# Altium PCB PCB1.PcbDoc
Units mil, origin at the board's own origin, x right, y up, seen from the top; angles counter-clockwise.
Board outline 1650 x 1035 mil, 2 copper layers (Top Layer, Bottom Layer); 21 components, 45 nets, 147 pads, 34 vias.
Unrouted connection lines stored in the file: 32.
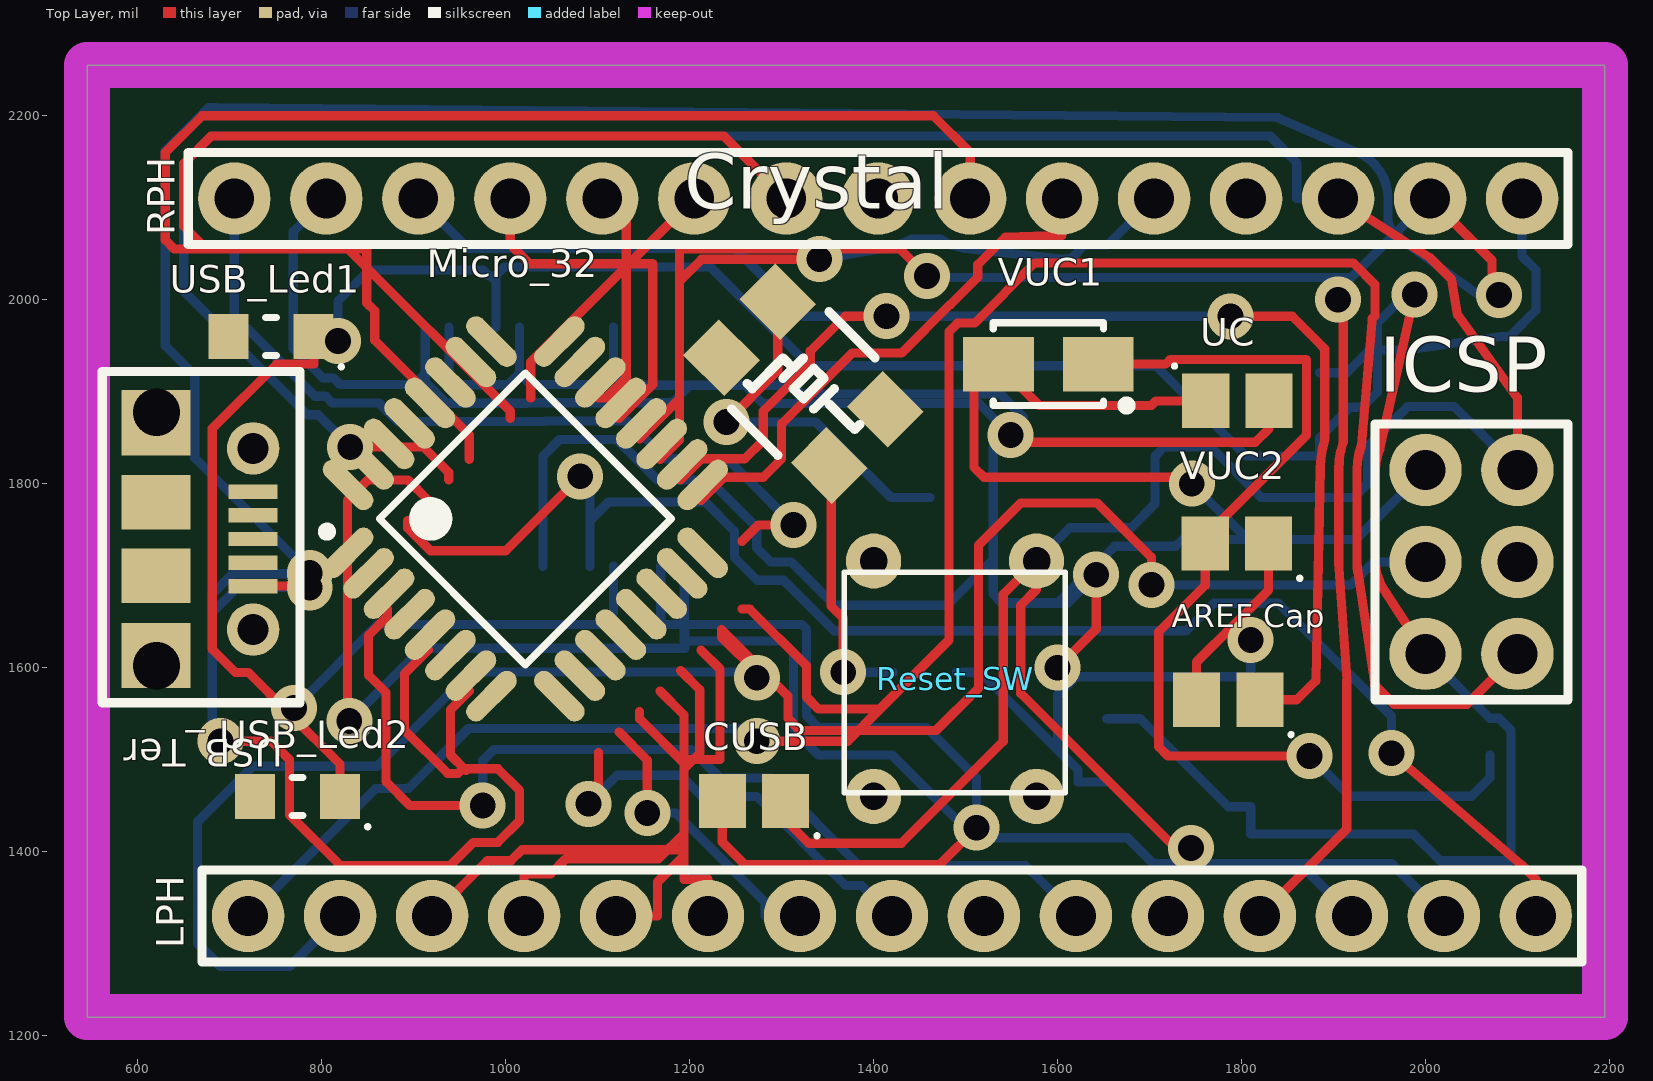
[diagram p0: Top Layer view]
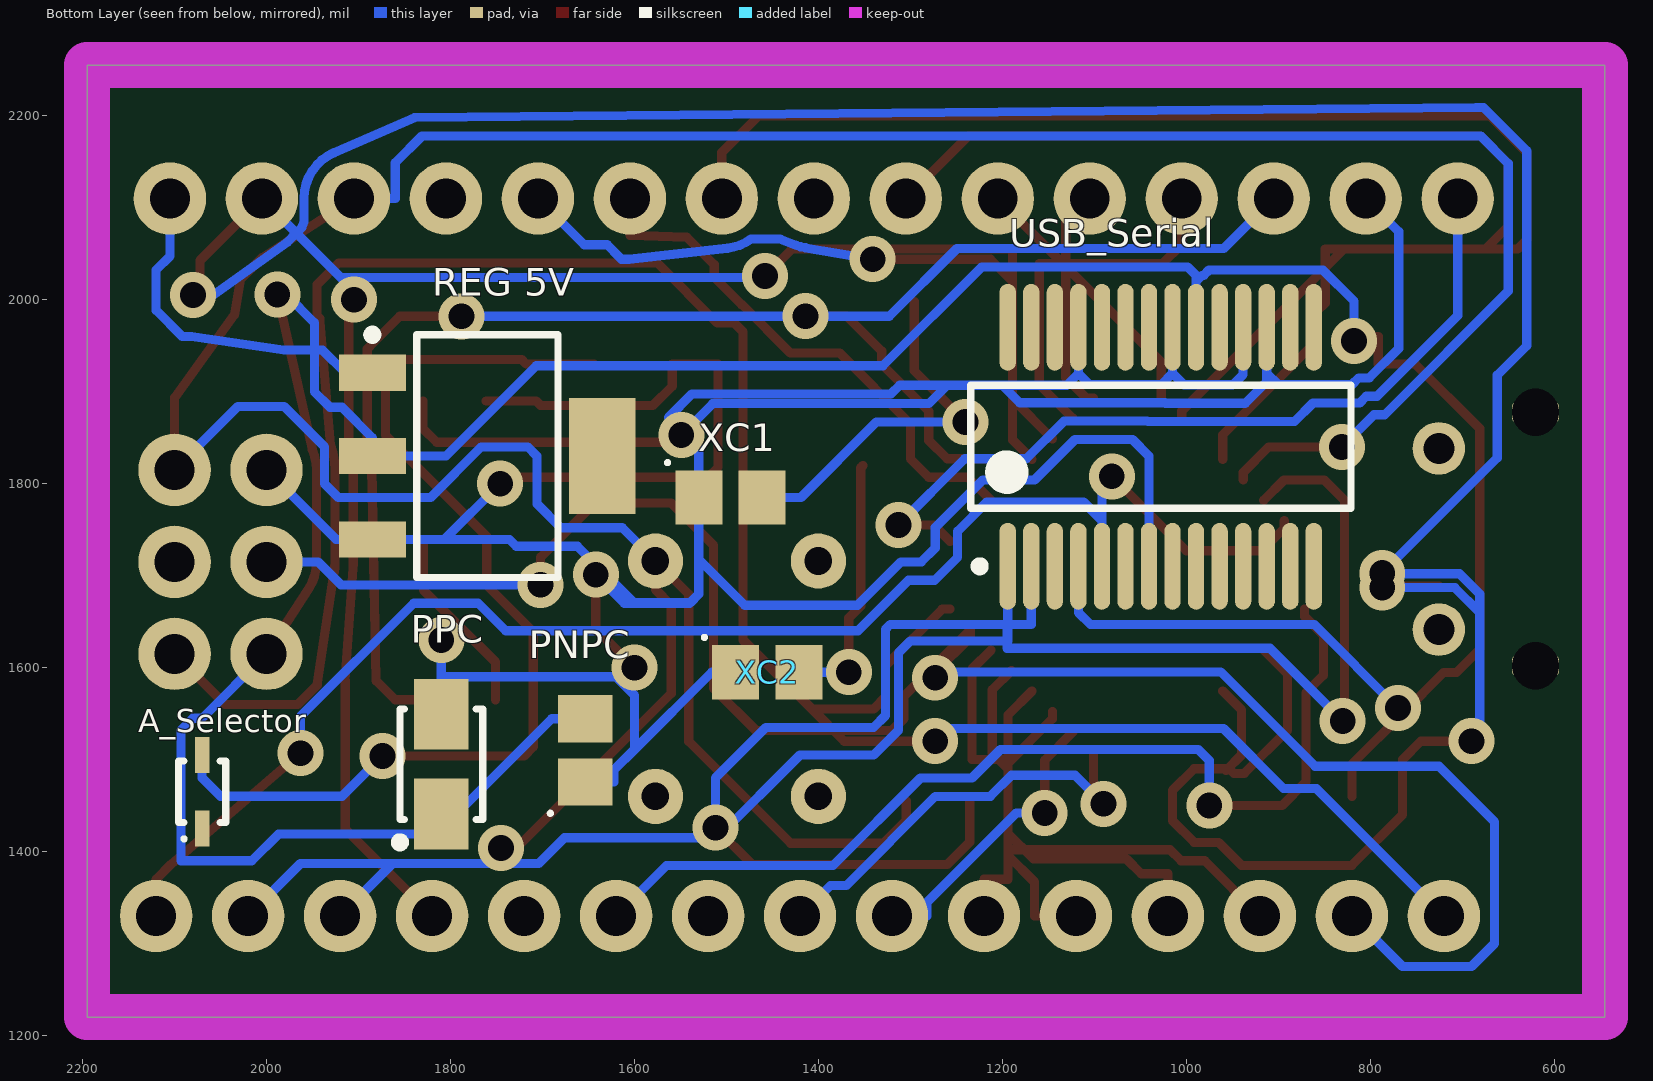
[diagram p1: Bottom Layer view, seen from below]

## Layer stack, top to bottom
Top Solder: solder mask 0.4, Solder Resist, Dk 3.5
Top Layer: signal copper 1.4
Dielectric 1: dielectric 12.6, FR-4, Dk 4.8
Bottom Layer: signal copper 1.4
Bottom Solder: solder mask 0.4, Solder Resist, Dk 3.5

## Board outline
545,1220 545,2255 2195,2255 2195,1220

## Design rules (kind name [scope] priority, off if disabled: settings)
Clearance [All] p1: gap=10 ignorepadtopadclearanceinfootprint=FALSE
PolygonConnect [All] p1: connectstyle=Relief reliefconductorwidth=10 reliefentries=4 polygonreliefangle="90 Angle" airgapwidth=10
RoutingVias [All] p1: holewidth=28 width=50 viastyle="Through Hole" minholewidth=28 minwidth=50 maxholewidth=28 maxwidth=50
SolderMaskExpansion [All] p1: expansion=4 istentingtop=FALSE
Width [All] p1: maxlimit=10 minlimit=10 preferedwidth=10
30 further rules are at their usual default settings.

## Components (designator, comment, footprint, x,y, rotation, side; value= is the part's Value field where it differs from the comment)
A_Selector "Panasonic DB2J20900L Schottky Diode, 0.5A, 20V, 2.4ns, 2-Pin SMini2 F5 B" DIOM1712X07N 2069.99,1465 r90 bottom
"AREF Cap" "100nF Ceramic Multilayer Capacitor_1" CAPCP2012X09N 1785.54,1565 r180 top
Crystal "Aker 16MHz Crystal SMT" "Aker S5C Crystal" 1234.66,1936.7 r135 top value=16MHz
CUSB "100nF Ceramic Multilayer Capacitor_1" CAPCP2012X09N 1270,1455 r180 top
ICSP "Programming Headers Dual Row" "ISP HEADER" 1544.99,920 r90 top
LPH "connector;str header;single row;.1 cont centers;.095 tail;gold or gtx;36 contact" Header 2119.99,1330 r180 top
Micro_32 "" TQFP80P900X900X120-32N 1021.43,1761.76 r45 top
PNPC "100nF Ceramic Multilayer Capacitor_1" CAPCP2012X09N 1653.52,1510 r90 bottom
PPC "Capacitor SMT Tantalum" "CASE A - 3216X18" 1809.99,1495 r90 bottom value=4.7µF
"REG 5V" "" SOT230P700X180-4N 1760,1830 r180 bottom
Reset_SW "" "Tactile Switch" 1577.16,1715.91 r90 top
RPH "connector;str header;single row;.1 cont centers;.095 tail;gold or gtx;36 contact" Header 2104.99,2110 r180 top
UC "100nF Ceramic Multilayer Capacitor_1" CAPCP2012X09N 1795.54,1890 r0 top
USB_Led1 "Kingbright Red LED, 100 mcd 120 ° 0805" LED1913X12NRED 744.99,1960 r180 top
USB_Led2 "Kingbright Red LED, 100 mcd 120 ° 0805" LED1913X12NRED 773.73,1460 r180 top
USB_Serial "FT232RL, Universal Asynchronous Receiver & Transmitter 3MBd, 28-Pin, SSOP" SOP65P780X200-28N 1027.79,1840.08 r90 bottom
USB_Ter "NewMolex Right Angle SMT Female Type B Micro USB Connector, 30 V ac, 1.8A" MicroUSB 725.43,1788.27 r270 top
VUC1 "Capacitor SMT Tantalum" "CASE A - 3216X18" 1589.99,1930 r180 top value=4.7µF
VUC2 "100nF Ceramic Multilayer Capacitor_1" CAPCP2012X09N 1794.99,1735 r180 top
XC1 "C0805C180J5GACTU" CAPCP2012X09N 1495.55,1785 r180 bottom
XC2 "C0805C180J5GACTU" CAPCP2012X09N 1455.55,1595 r180 bottom

## Footprints (in the part's own frame and the unit in brackets; to place one, negate y for a bottom-side part, rotate by r counter-clockwise, add the part's x,y. Pads: shape width x height; smd on the part's side, far side on the other; paste and mask are expansions set on the pad)
"Aker S5C Crystal" [mm]
  rect 1.6x1.4 smd: 1(0,0) 2(-4.2,0) 3(0,-2.2) 4(-4.2,-2.2)
  round 0.254 on Top Overlay: 5(-3,-2.4)
  silkscreen extent -4,-3 -1,0.8, body extent -4.7,-2.8 0.5,0.6, height 1
CAPCP2012X09N [mm] "Chip Capacitor, 2-Leads, Body 2.00x1.25mm, IPC Medium Density"
  rect 1.3x1.5 smd: 1(-0.875,0) 2(0.875,0)
  silkscreen extent -1.79,0.91 -1.69,1.01, body extent -1.05,-0.57 0.95,0.68, height 0.78
"CASE A - 3216X18" [mm] "Molded Capacitor, 2-Leads, Body 3.2x1.6mm, IPC Medium Density"
  rect 1.95x1.5 smd: 1(-1.375,0) 2(1.375,0)
  silkscreen extent -2.28,-1.14 1.52,1.27, body extent -1.52,-0.76 1.65,0.84, height 1.77
DIOM1712X07N [mm] "Molded Diode, 2-Leads, Body 1.70x1.25mm, IPC Medium Density"
  rect 1x0.4 smd: 1(-1.016,0) 2(1.016,0)
  silkscreen extent -1.35,-0.65 0.85,0.65, body extent -0.9,-0.45 0.9,0.45, height 0.8
Header [mm] "SIL Header"
  round 2 hole 1.1: 1(0,0) 2(2.54,0) 3(5.08,0) 4(7.62,0) 5(10.16,0) 6(12.7,0) 7(15.24,0) 8(17.78,0) 9(20.32,0) 10(22.86,0) 11(25.4,0) 12(27.94,0) 13(30.48,0) 14(33.02,0) 15(35.56,0)
  silkscreen extent -1.27,-1.27 36.83,1.27, body extent -1.33,-1.35 36.93,1.35, height 8.6
"ISP HEADER" [mm] "SIL Header for programming"
  round 2 hole 1.1: 1(17.653,-14.097) 2(17.653,-11.557) 3(20.193,-14.097) 4(20.193,-11.557) 5(22.733,-14.097) 6(22.733,-11.557)
  silkscreen extent 16.38,-15.49 24,-10.16, body extent 16.38,-15.37 24,-10.29, height 8
LED1913X12NRED [mm] "LED 2-Leads, Body 1.90x1.32mm, IPC Medium Density"
  rect 1.1x1.25 smd: 1(-1.175,0) 2(1.175,0)
  silkscreen extent -1.99,-0.53 0.15,0.89, body extent -1.02,-0.43 1.04,0.47, height 0.85
MicroUSB [mm] "MicroUSB  Molex 5Pin"
  rect 0.4x1.35 smd: 1(-0.07,0) 2(0.58,0) 3(1.23,0) 4(1.88,0) 5(2.53,0)
  rrect50% 0.6x1.3 hole 1.3: ""(-2.27,-2.667) ""(-2.27,-2.667) ""(4.73,-2.667)
  rect 1.8x1.9 smd: ""(-1.98,-2.678) ""(4.45,-2.678)
  round 1.45 hole 0.85: ""(-1.27,0) ""(3.73,0)
  rect 1.5x1.9 smd: ""(0.218,-2.678) ""(2.242,-2.678)
  silkscreen extent -3.39,-4.17 5.75,1.3, body extent -2.83,-5.32 5.37,0.11, height 2.68
SOP65P780X200-28N [mm] "SOP, 28-Leads, Body 10.20x5.30mm, Pitch 0.65mm, IPC Medium Density"
  oval 2.4x0.45 smd: 1(-3.3,4.225) 2(-3.3,3.575) 3(-3.3,2.925) 4(-3.3,2.275) 5(-3.3,1.625) 6(-3.3,0.975) 7(-3.3,0.325) 8(-3.3,-0.325) 9(-3.3,-0.975) 10(-3.3,-1.625) 11(-3.3,-2.275) 12(-3.3,-2.925) 13(-3.3,-3.575) 14(-3.3,-4.225) 15(3.3,-4.225) 16(3.3,-3.575) 17(3.3,-2.925) 18(3.3,-2.275) 19(3.3,-1.625) 20(3.3,-0.975) 21(3.3,-0.325) 22(3.3,0.325) 23(3.3,0.975) 24(3.3,1.625) 25(3.3,2.275) 26(3.3,2.925) 27(3.3,3.575) 28(3.3,4.225)
  silkscreen extent -3.42,-5.25 1.7,5.25, body extent -3.91,-5.1 3.91,5.1, height 2
SOT230P700X180-4N [mm] "SOT223, 4-Leads, Body 6.50x7.00mm (avg), Pitch 2.30mm, IPC Medium Density"
  rect 1.85x1 smd: 1(-3.175,2.3) 2(-3.175,0) 3(-3.175,-2.3)
  rect 1.85x3.2 smd: 4(3.175,0)
  silkscreen extent -3.3,-3.35 1.95,3.47, body extent -3.8,-3.12 3.29,3.38, height 1.65
"Tactile Switch" [mil]
  round 60 hole 30: 1(0,0) 2(-255.91,0) 3(0,177.16) 4(-255.91,177.16)
  silkscreen extent -252,-31 -12,209, body extent -277,-29 27,209, height 197
TQFP80P900X900X120-32N [mm] "TQFP, 32-Leads, Body 7.00x7.00mm, Pitch 0.80mm, IPC Medium Density"
  oval 1.75x0.55 smd: 1(-4.125,2.8) 2(-4.125,2) 3(-4.125,1.2) 4(-4.125,0.4) 5(-4.125,-0.4) 6(-4.125,-1.2) 7(-4.125,-2) 8(-4.125,-2.8) 17(4.125,-2.8) 18(4.125,-2) 19(4.125,-1.2) 20(4.125,-0.4) 21(4.125,0.4) 22(4.125,1.2) 23(4.125,2) 24(4.125,2.8)
  oval 0.55x1.75 smd: 9(-2.8,-4.125) 10(-2,-4.125) 11(-1.2,-4.125) 12(-0.4,-4.125) 13(0.4,-4.125) 14(1.2,-4.125) 15(2,-4.125) 16(2.8,-4.125) 25(2.8,4.125) 26(2,4.125) 27(1.2,4.125) 28(0.4,4.125) 29(-0.4,4.125) 30(-1.2,4.125) 31(-2,4.125) 32(-2.8,4.125)
  silkscreen extent -4.25,-2.85 2.85,3.75, body extent -4.44,-4.5 4.56,4.5, height 1.6

## Part data
A_Selector: library part "Schottky Diode, 0.5A, 20V, 2.4ns, 2-Pin SMini2 F5 B", Manufacturer=Panasonic, Manufacturer Part No.=DB2J20900L, Maximum Continuous Forward Current=0.5A, Peak Reverse Repetitive Voltage=20V, Created By="R Kanjee", Datasheet=http://docs-europe.electrocomponents.com/webdocs/1398/0900766b813986b3.pdf, Date Created="1 March 2015", RS Stock No.=713-2703
"AREF Cap" CUSB PNPC UC VUC2: "AVX 0805 Standard 100nF Ceramic Multilayer Capacitor, 50 V dc X7R Dielectric ±10% SMD", Capacitance=100nF, Manufacturer=AVX, Package=0805, Voltage=50V, Creator="Ritesh Kanjee", Datasheet URL=http://za.rs-online.com/web/p/ceramic-multilayer-capacitors/4646688/, Date Created="18 February 2015", RS Stock No.=464-6688
Crystal: library part "Aker  C5S-16.000-12-3030-X", "Aker S5C SMT Crystal", Frequency Stability=+/-30ppm, Load Capacitance=12pF, Manufacturer=Aker, Manufacturer Part #=C5S-16.000-12-3030-X, Package="3.2x5mm SMD", Creator="R Kanjee", HelpURL=http://za.rs-online.com/web/p/crystal-units/6719488/, RS Stock Nr.=671-9488, Supplier=RS
ICSP: library part "Programming ISP, Programming Headers Dual Row", Current Rating="3Amps Continuous", Manufacturer=FCI, Manufacturer Part No.=68000-236HLF, Created By="R Kanjee", Date Created="1 March 2015", RS Stock No.=2509565626
LPH RPH: library part "Single row; PCB headers", Current Rating="3Amps Continuous", Manufacturer=FCI, Manufacturer Part No.=68000-236HLF, Created By="R Kanjee", Date Created="1 March 2015", RS Stock No.=2509565626
Micro_32: library part ATMEGA328P-AU, "ATMEGA328P-AU, 8 bit AVR Microcontroller 20MHz 1 kB, 32 kB Flash, 2 kB RAM, I2C 32-Pin TQFP", Company="Lumina Inova", Created By="Ritesh Kanjee", Datasheet URL=http://docs-europe.electrocomponents.com/webdocs/0db4/0900766b80db4deb.pdf, Date Created="14 February 2015", RS Stock No.=696-3092
PPC VUC1: library part "4.7µF Tant RS 496-3545", "Capacitor,tantalum,SMT,16V,4.7uF,10%,A-case", Package=3216-18, Tolerance=10%, Voltage=16V, ComponentLink1Description="Supplier Website", ComponentLink1URL=http://za.rs-online.com/web/search/searchBrowseAction.html?method=getProduct&R=4963545, ComponentLink2Description="RS Data sheet", ComponentLink2URL=http://docs-europe.origin.electrocomponents.com/webdocs/04ed/0900766b804ed4cc.pdf, LatestRevisionDate=28-April-2010, Part Originator="H Theron", Publisher=DPSS, RS Stock Nr.=496-3545
"REG 5V": library part LM1117MP-5.0, "LM1117MP-5.0/NOPB, Low Dropout Voltage Regulator, 1.5A, 5 V ±1%, 4-Pin SOT-223", Manufacturer="Texas Instruments", Maximum Input Voltage=15V, Output Voltage=5V, Supply Current=1.5Amps, Created By="R Kanjee", Datasheet URL=http://za.rs-online.com/web/p/low-dropout-voltage-regulators/5339583/, Date Created="26 February 2015", RS Stock No.=533-9583
Reset_SW: library part "Tactile Switch SPST- NO 0.05A @24V", "Tactile Switch SPST- NO 0.05A @24V", Manufacturer=Omron, Manufacturer Part No.=B3F1000, Creator="R Kanjee", Date Created="25 February 2015", RS Stock No.=686-6847, State="Normaly Open"
USB_Led1 USB_Led2: Color=RED, Forward Voltage=1.85V, Manufacturer=KingBright, Manufacturer Part No.=KP-2012SRC-PRV, Creator="Ritesh Kanjee", Datasheet URL=http://za.rs-online.com/web/p/visible-leds/4663813/, Date Created="18 February 2015", RS Stock No.=466-3813
USB_Serial: library part "FT232RL USB to UART, Universal Asynchronous Receiver & Transmitter 3MBd, 28-Pin, SSOP", Manufacturer="FTDI Chip", Manufacturer Part No.=FT232RL, Creator="R Kanjee", Date Created="03 March 2015", Pin Count=28, RS Stock No.=406-580
USB_Ter: library part "Micro USB Connector, 30 V ac, 1.8A", Manufacturer=Molex, Manufacturer Part No.=105017-0001, Max Current=1.8A, Max Voltage=30V, Creator="R Kanjee", Datasheet URL=http://za.rs-online.com/web/p/micro-usb-connectors/8486764/, Date Created="28 February 2015", RS Stock No=848-6764
XC1 XC2: library part "18pF Ceramic Multilayer Capacitor, 50 V dc C0G Dielectric ±5% SMD", "18pF Ceramic Multilayer Capacitor, 50 V dc C0G Dielectric ±5% SMD", Capacitance=18pF, Manufacturer=Kemet, Package=0805, Voltage=50V, Creator="Ritesh Kanjee", Datasheet URL=http://za.rs-online.com/web/p/ceramic-multilayer-capacitors/6480935/?searchTerm=C0805C180J5GACTU&relevancy-data=636F3D3226696E3D4931384E4B6E6F776E41734D504E266C753D656E266D6D3D6D61746368616C6C7061727469616C26706D3D5E5B5C707B4C7D5C707B4E647D2D2C2F255C2E5D2B2426706F3D313326736E3D592673743D4D414E5F504152545F4E554D4245522677633D424F5448267573743D4330383035433138304A35474143545526, Date Created="18 February 2015", RS Stock No.=648-0935

## Via types
v1: diameter 50, hole 28, Top Layer to Bottom Layer, 34 vias

## Nets (pads, with @x,y where several pads share a name; then routed paths per layer and width w, separated by ;. In a path a pad name is that pad's centre, name@x,y a point inside that pad or via, vN(x,y) a via of type N, cw(c..) or ccw(c..) an arc to the next point about the centre after c; other vN are vias at no path point)
3V3: RPH.14 UC.2 USB_Serial.17 | length 1399
  Top Layer w10: v1(1549,1853) 1557,1845 1814.99,1845 1829.99,1860 UC.2
  Bottom Layer w10: RPH.14 769,2074.01 769,1947.03 801.03,1915 812.57,1915 819.81,1907.75 900.39,1907.75 912.64,1920 ; USB_Serial.17 912.64,1920 ; v1(1549,1853) 1515,1887 1280,1887 1260,1907 1200,1907 1181,1888 1023,1888 1022.5,1887.5 936,1887.5 912.64,1910.86 912.64,1920
+5: "REG 5V.2" ICSP.2 PNPC.2 PPC.1 USB_Led1.1 USB_Led2.1 USB_Serial.4 USB_Serial.20 | length 3818.3
  Top Layer w10: v1(770,1556) v1@764.47,1550.47 ; v1(817.6,1955) 812.6,1960 USB_Led1.1 791.25,1930 751,1930 681,1860 681,1620 706.16,1594.84 720.11,1594.84 v1@764.47,1550.47 ; USB_Led2.1 819.99,1494.96 v1@764.47,1550.47 ; v1(1988.31,2005.63) 1950.26,1836.97 ccw(c1999.99,1815) 1945.62,1815 1945.62,1715 ccw(c1999.99,1715) 1954.33,1685.48 ICSP.2
  Bottom Layer w10: v1(770,1556) 860.98,1646.98 1104.34,1646.98 1117.36,1660 USB_Serial.4 ; v1(817.6,1955) 817.6,1998.27 851.57,2032.24 975.29,2032.24 981.12,2026.41 983,2026.41 989.41,2020 USB_Serial.20 ; 989.41,2021.47 989.41,2026.41 998.63,2035.63 1222.5,2035.63 1329.9,1928.23 1706.77,1928.23 1805,1830 1885,1830 1885,1850 1918,1883 1931,1883 1948,1900 1948,1975 1978.63,2005.63 v1(1988.31,2005.63) ; PNPC.2 1690,1544.45 1785.62,1448.83 1809.99,1448.83 PPC.1 1809.99,1419 1987,1419 2016,1390 2093,1390 2093,1532 2080,1545 2069.99,1545 ICSP.2
+5V: A_Selector.1 RPH.4
A0: Micro_32.23 RPH.12 | length 396.9
  Top Layer w10: RPH.12 1004.99,2060 1025.99,2039 1160,2039 1160,1907.71 1123.31,1871.02
A1: Micro_32.24 RPH.11 | length 259.8
  Top Layer w10: 1101.04,1893.3 1109.06,1893.3 1131,1915.24 1131,2110 RPH.11
A2: Micro_32.25 RPH.10 | length 290.3
  Top Layer w10: 1027.27,1893.3 1027.27,1932.28 RPH.10
A3: Micro_32.26 RPH.9 | length 1209.8
  Top Layer w10: 1005,1871.02 1005,1879.04 829.04,2055 675,2055 650,2080 650,2148 680,2178 1236.99,2178 RPH.9
A4: Micro_32.27 RPH.8
A5: Micro_32.28 RPH.7 | length 1551
  Top Layer w10: 960.46,1826.48 960.46,1853.02 857.6,1955.88 857.6,1987.87 849,1996.47 849,2055 640,2055 630,2065 630,2160 670,2200 1464.99,2200 1504.99,2160 RPH.7
A6: Micro_32.19 RPH.6 | length 581.6
  Top Layer w10: 1212.4,1781.94 1237.46,1807 1280,1807 1300,1827 1300,1865.24 1376.81,1942.05 1430.5,1942.05 1482.97,1994.53 1483.35,1994.53 1513.21,2024.39 1513.21,2038.14 1543.07,2068 1604.99,2069.99 RPH.6
A7: Micro_32.22 RPH.5 | length 748
  Top Layer w10: 1145.59,1848.75 1189,1892.17 1189,2020 1213,2044 v1(1341,2044)
  Bottom Layer w10: v1(1341,2044) 1414.08,2056.4 ccw(c1404.99,2110) 1424.67,2059.32 1441.56,2065.88 1473.22,2065.88 ccw(c1504.99,2110) 1498.95,2055.97 1605.72,2044 1614,2044 1616.93,2046.93 1629.65,2059.65 1654.64,2059.65 RPH.5
AREF: "AREF Cap.1" Micro_32.20 RPH.13 | length 1826.3
  Top Layer w10: 1190.13,1804.21 1212.92,1827 1260,1827 1280,1847 1280,1878.71 1331.17,1929.89 1331.17,1944.14 1369.09,1982.05 v1(1413.93,1982.05) ; v1(1788,1982) 1855.09,1982 1887.65,1949.43 1890.58,1946.51 1890.58,1848.32 ccw(c1999.99,1815) 1885.64,1817.37 1880.83,1585.83 1860,1565 1819.99,1565
  Bottom Layer w10: RPH.13 959.36,2055.63 1249.37,2055.63 1323,1982 1398,1982 v1@1405.94,1974.06 ; v1(1413.93,1982.05) v1@1405.94,1974.06 ; v1(1788,1982) 1413.9,1982.03 v1@1405.94,1974.06
D0/RX: LPH.2 Micro_32.30 USB_Serial.1 | length 1852
  Top Layer w10: v1(830,1542) 828,1544 828,1782 850,1804 893.86,1804 915.92,1781.94
  Bottom Layer w10: v1(830,1542) 909,1621 1195,1621 1195,1629 ; USB_Serial.1 1194.13,1647.87 ; LPH.2 1962.99,1387 1704,1387 1676,1415 1510,1415 1420,1505 1340,1505 1313,1532 1313,1616 1300,1629 1195,1629 ; 1194.13,1647.87 1194.13,1629 1195,1629 ; 1194.13,1647.87 1195,1647 1195,1629
D1/TX: LPH.1 Micro_32.31 USB_Serial.5 | length 1647.3
  Top Layer w10: 893.64,1759.67 893.64,1751.66 918.3,1727 1000,1727 v1(1081,1808) ; v1(1963,1507) 2103.99,1386 2119.99,1370 LPH.1
  Bottom Layer w10: v1(1081,1808) 1091.77,1797.23 1091.77,1760 ; USB_Serial.5 1091.77,1760 ; v1(1963,1507) 1963,1547 1840,1670 1770,1670 1740,1640 1357,1640 1302,1695 1273.69,1695 1248.69,1720 1248.69,1748.31 1217,1780 1111.77,1780 1091.77,1760
D2: LPH.5 Micro_32.32
D3: LPH.6 Micro_32.1 | length 1093.6
  Top Layer w10: 871.37,1663.63 871.37,1655.61 851,1635.24 851,1591.68 870,1572.68 870,1476 896,1450 v1(975,1450)
  Bottom Layer w10: v1(975,1450) 975,1499 987,1511 1202,1511 1233,1480 1289,1480 1384,1385 1564.99,1385 LPH.6
D4: LPH.7 Micro_32.2
D5: LPH.8 Micro_32.9 | length 466.5
  Top Layer w10: v1(1090,1452) 1101.04,1463.04 1101.04,1507.73
  Bottom Layer w10: v1(1090,1452) 1121,1483 1190,1483 1213,1460 1272.79,1460 1369.79,1363 1386.98,1363 LPH.8
D6: LPH.9 Micro_32.10 | length 321.9
  Top Layer w10: 1123.31,1530 1154,1499.31 v1(1154,1442)
  Bottom Layer w10: v1(1154,1442) 1185,1442 1282,1345 1282,1330 LPH.9
D7: LPH.10 Micro_32.11 | length 268.3
  Top Layer w10: 1145.59,1552.27 1145.59,1544.26 1194,1495.84 1194,1370 1219.99,1370 LPH.10
D8: LPH.11 Micro_32.12 | length 312.4
  Top Layer w10: LPH.11 1165,1330 1165,1367 1194,1396 1194,1548.4 1167.86,1574.54
D9: LPH.12 Micro_32.13 | length 430.7
  Top Layer w10: LPH.12 1019.99,1376 1049,1376 1065,1392 1166,1392 1194,1420 1194,1490 1211,1507 1211,1575.94 1190.13,1596.81
D10: LPH.13 Micro_32.14 | length 568.5
  Top Layer w10: LPH.13 979.99,1390 1005.7,1390 1017.7,1402 1194,1402 1194,1500 1233,1500 1233,1598.48 1212.4,1619.08
D11/MOSI: ICSP.4 LPH.14 Micro_32.15 | length 2150.1
  Top Layer w10: v1(1273,1589) 1273,1595.01 1234.67,1633.34 1234.67,1641.35 1307,1569.02 1307,1544.63 1320,1531.63 1467.87,1531.63 1514,1577.76 1514,1733 1560,1779 1643,1779 1702,1720 v1(1702,1690)
  Bottom Layer w10: LPH.14 764.99,1275 690,1275 665,1300 665,1432.31 725.38,1492.68 860,1492.68 962.72,1595.4 1266.6,1595.4 v1(1273,1589) ; v1(1702,1690) 1919,1690 1944,1715 ICSP.4
D12/MISO: ICSP.1 LPH.15 Micro_32.16 | length 2577.4
  Top Layer w10: 1256.94,1663.63 1265.37,1663.63 1327,1602 1327,1568 1340,1555 1407,1555 ; v1(1273,1520) 1372,1520 1407,1555 ; ICSP.1 2044.99,1560 1966,1560 1944.93,1581.07 1926.45,1703.94 cw(c1999.99,1715) 1925.62,1715 1925.62,1815 cw(c1999.99,1815) 1930.58,1841.71 1941.7,1975.78 1942,1979.43 1944.59,1982.02 1945,1982.43 1945,2016.57 1921.57,2040 1575.28,2040 1509.81,1974.53 1491.25,1974.53 1482,1965.27 1482,1630 1407,1555
  Bottom Layer w10: LPH.15 858.45,1468.46 894.22,1468.46 959.56,1533.81 1259.19,1533.81 v1(1273,1520)
D13/SCK: ICSP.3 Micro_32.17 RPH.15 | length 893.4
  Top Layer w10: 1256.94,1737.4 1274.54,1755 v1(1313,1755)
  Bottom Layer w10: RPH.15 704.99,1982.76 792.74,1895 804.28,1895 811.53,1887.75 862.25,1887.75 882.5,1867.5 1042,1867.5 1042.5,1868 1133,1868 1174,1827 1241,1827 v1(1313,1755)
GND: "AREF Cap.2" "REG 5V.3" ICSP.6 PNPC.1 PPC.2 UC.1 USB_Serial.7 USB_Serial.18 USB_Serial.21 USB_Serial.25 VUC1.2 VUC2.1 XC1.1 XC2.1 | length 4074.1
  Top Layer w10: v1(1600,1600) 1642,1642 v1(1642,1701) ; v1(1746,1800) 1739,1807 1520,1807 1509,1818 1509,1930 VUC1.2 1559,1930 1559,1906 1580,1885 1702,1885 1707,1890 UC.1 ; 1751.09,1565 1751.09,1606.09 v1@1792.49,1647.49 ; v1(1810,1629.99) v1@1792.49,1647.49 ; VUC2.1 1829.44,1684.44 v1@1792.49,1647.49
  Bottom Layer w10: USB_Serial.18 938.23,1918.77 949.5,1907.5 1002.5,1907.5 1015,1920 ; USB_Serial.21 1015,1920 ; USB_Serial.7 1040.59,1830 1058.59,1848 1121,1848 1165,1804 1221.29,1804 1273,1752.29 1273,1730 1288,1715 1310.29,1715 1357.56,1667.73 1480,1667.73 1530,1717.73 ; USB_Serial.25 1117.36,1920 ; XC2.1 1516,1595 1600,1511 ; v1(1600,1600) 1610,1590 v1@1620,1590 ; v1(1642,1701) 1611,1670 1540,1670 1539.12,1670.88 ; PNPC.1 1622.16,1475.55 1622.16,1488.84 1600,1511 ; v1(1746,1800) 1806.55,1739.45 ; PPC.2 1809.99,1590 ; v1(1810,1629.99) 1809.99,1590 ; ICSP.6 1924.44,1739.45 1885,1739.45 1806.55,1739.45 ; 1015,1920 1027.32,1907.68 1105.04,1907.68 1117.36,1920 ; 1117.36,1920 1117.36,1919.64 1130,1907 1311.66,1907 1321.06,1897.6 1537.4,1897.6 1563,1872 1530,1839 XC1.1 1530,1717.73 ; 1530,1717.73 1530,1680 1539.12,1670.88 ; 1539.12,1670.88 1600.88,1670.88 1662.01,1732.01 1728.56,1732.01 1736,1739.45 1806.55,1739.45 ; 1600,1511 1600,1570 v1@1620,1590 ; v1@1620,1590 1809.99,1590
ground: LPH.4 Micro_32.3 Micro_32.5 Micro_32.21 RPH.2 USB_Ter.5 | length 5390.1
  Top Layer w10: v1(690,1520) 745,1520 765,1500 765,1440 820,1385 940,1385 965,1410 991.57,1410 1015,1433.43 1015,1466.57 991.57,1490 953.28,1490 948.28,1485 937,1485 890,1532 890,1593.17 Micro_32.5@915.92,1619.08 ; USB_Ter.5 v1@772.66,1688.66 ; v1(787,1687) 785.34,1688.66 v1@773.66,1688.66 ; v1(787,1702) v1@773.66,1688.66 ; v1(787,1703) v1@772.66,1688.66 ; 956.72,1488.28 940,1505 940,1554.08 960.46,1574.54 ; 1167.86,1826.48 1189,1847.63 1189,2055 1429,2055 v1(1458.12,2025.88) ; LPH.4 1914.52,1424.53 1914.52,1586.06 1905.85,1708.42 cw(c1999.99,1715) 1905.62,1715 1905.62,1815 cw(c1999.99,1815) 1910.58,1845.2 1910.58,1994.42 v1(1905,2000) ; RPH.2 2072.35,2042.64 2072.35,2012.65 v1(2080,2005) ; v1@772.66,1688.66 v1@773.66,1688.66
  Bottom Layer w10: v1(690,1520) 681,1529 681,1660 ; v1(787,1687) 708,1687 681,1660 ; v1(787,1702) 703,1702 681,1680 681,1660 ; v1(787,1703) 662,1828 662,1918 630,1950 630,2162 677.07,2209.07 685.36,2209.07 1839.28,2198 1926.74,2159.83 cw(c1904.99,2110) 1959.36,2110 1959.36,2084.37 1961.64,2078.36 1967.49,2072.51 ; v1@1460,2024 1918.99,2024 ; v1(1905,2000) 1905,2010.01 1918.99,2024 ; RPH.2 1967.49,2072.51 ; v1(2080,2005) 2075,2000 2065,2000 1977.48,2062.52 1967.49,2072.51 ; 1918.99,2024 1967.49,2072.51
"NetBlue Led_1": 
NetCrystal_2: Crystal.2 XC2.2 | length 285.3
  Top Layer w10: Crystal.2 1354,1817.36 1354,1666.9 1367,1653.9 v1(1367,1595)
  Bottom Layer w10: v1(1367,1595) XC2.2
NetCrystal_3: Crystal.3 XC1.2 | length 409.2
  Top Layer w10: v1(1240,1867) 1295.9,1922.9 Crystal.3
  Bottom Layer w10: v1(1240,1867) 1337,1867 1419,1785 XC1.2
NetCUSB_2: CUSB.2 USB_Serial.2 | length 932.4
  Top Layer w10: CUSB.2 1235.55,1410.45 1260,1386 1472,1386 v1(1512,1426)
  Bottom Layer w10: USB_Serial.2 1168.54,1647 1321.71,1647 1327,1641.71 1327,1548 1340,1535 1457,1535 1512,1480 v1(1512,1426)
NetL_AMBER_1: 
NetRes_ULed1_1: USB_Serial.23
NetRes_ULed1_2: USB_Led1.2
NetRes_ULed2_1: USB_Serial.22
NetRes_ULed2_2: USB_Led2.2
NetUSB_Serial_15: USB_Serial.15 USB_Ter.3
NetUSB_Serial_16: USB_Serial.16 USB_Ter.2
PVCC5: Micro_32.4 Micro_32.6 Micro_32.18
Reset: CUSB.1 ICSP.5 LPH.3 Micro_32.29 Reset_SW.1 RPH.3 | length 4072.2
  Top Layer w10: v1(831,1840) 910.41,1840 938.19,1812.23 938.19,1804.21 ; CUSB.1 1304.45,1434 1329.45,1409 1430.19,1409 1541,1519.81 1541,1679.74 Reset_SW.1 1577.16,1685 1560,1667.84 1560,1572 1728,1404 v1(1745,1404) ; RPH.3 1975.43,2064.37 ccw(c2004.99,2110) 1975.8,2064.13 2004.87,2045.63 2028.31,2022.2 2035,1983.43 2099.99,1893.58 ICSP.5
  Bottom Layer w10: v1(831,1840) 796,1875 784.46,1875 650,2009.46 650,2148 680,2178 1831,2178 1860,2149 1860,2110 RPH.3 ; Reset_SW.1 1613.26,1752.01 1680,1752.01 1706,1778.01 1706,1830 1716,1840 1766.48,1840 1821.48,1785 1922,1785 1937,1800 1937,1840 1981,1884 2030.99,1884 ICSP.5 ; v1(1745,1404) 1762,1387 1862.99,1387 LPH.3
VCC: "REG 5V.1" RPH.1 | length 385.9
  Bottom Layer w10: 1885,1920.55 1914.52,1920.55 1939.31,1945.34 1981.21,1945.34 2081.57,1960 2091.57,1960 2120,1988.43 2120,2032.41 2104.99,2047.42 RPH.1
VUSB: A_Selector.2 USB_Ter.1 VUC1.1 VUC2.2 | length 1131.4
  Top Layer w10: VUC1.1 1717.51,1930 1722.51,1935 1870.11,1935 1870.58,1934.53 1870.58,1852.58 1760.54,1742.54 VUC2.2 1760.54,1689.54 1710,1639 1710,1514 1720,1504 v1(1874,1504)
  Bottom Layer w10: v1(1874,1504) 1917.93,1460.07 2050.06,1460.07 2069.99,1480 A_Selector.2
XTAL1: Crystal.1 Micro_32.7
XTAL2: Crystal.4 Micro_32.8
pads on no net: "REG 5V.4" Crystal.5 Reset_SW.2 Reset_SW.3 Reset_SW.4 USB_Serial.3 USB_Serial.6 USB_Serial.8 USB_Serial.9 USB_Serial.10 USB_Serial.11 USB_Serial.12 USB_Serial.13 USB_Serial.14 USB_Serial.19 USB_Serial.24 USB_Serial.26 USB_Serial.27 USB_Serial.28 USB_Ter. USB_Ter.4

## Keep-outs
Keep-Out Layer:
  the board outline again, w50